# Altium PCB Copy of PCB1.PcbDoc
Units mm, origin at the board's own origin, x right, y up, seen from the top; angles counter-clockwise.
Board outline 80 x 60 mm, 2 copper layers (Top Layer, Bottom Layer); 55 components, 79 nets, 357 pads, 132 vias.
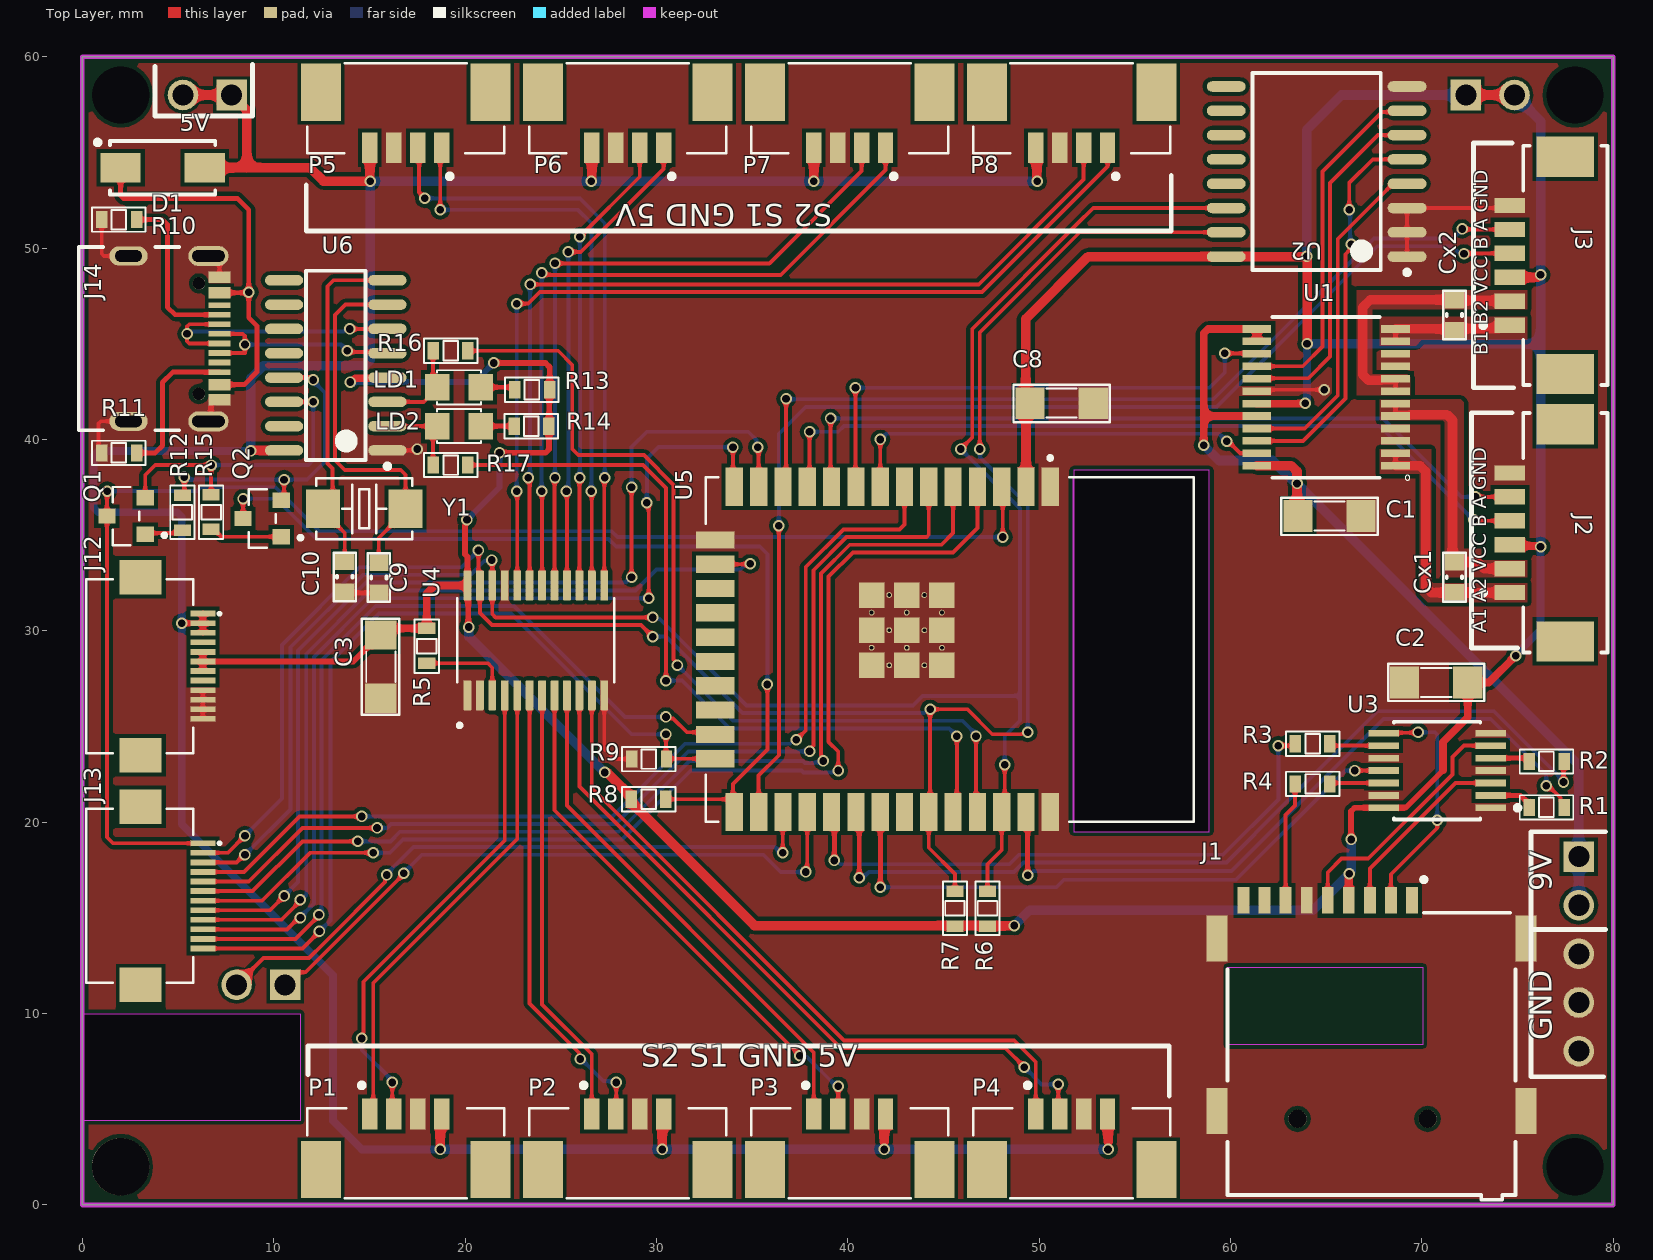
[diagram p0: Top Layer view]
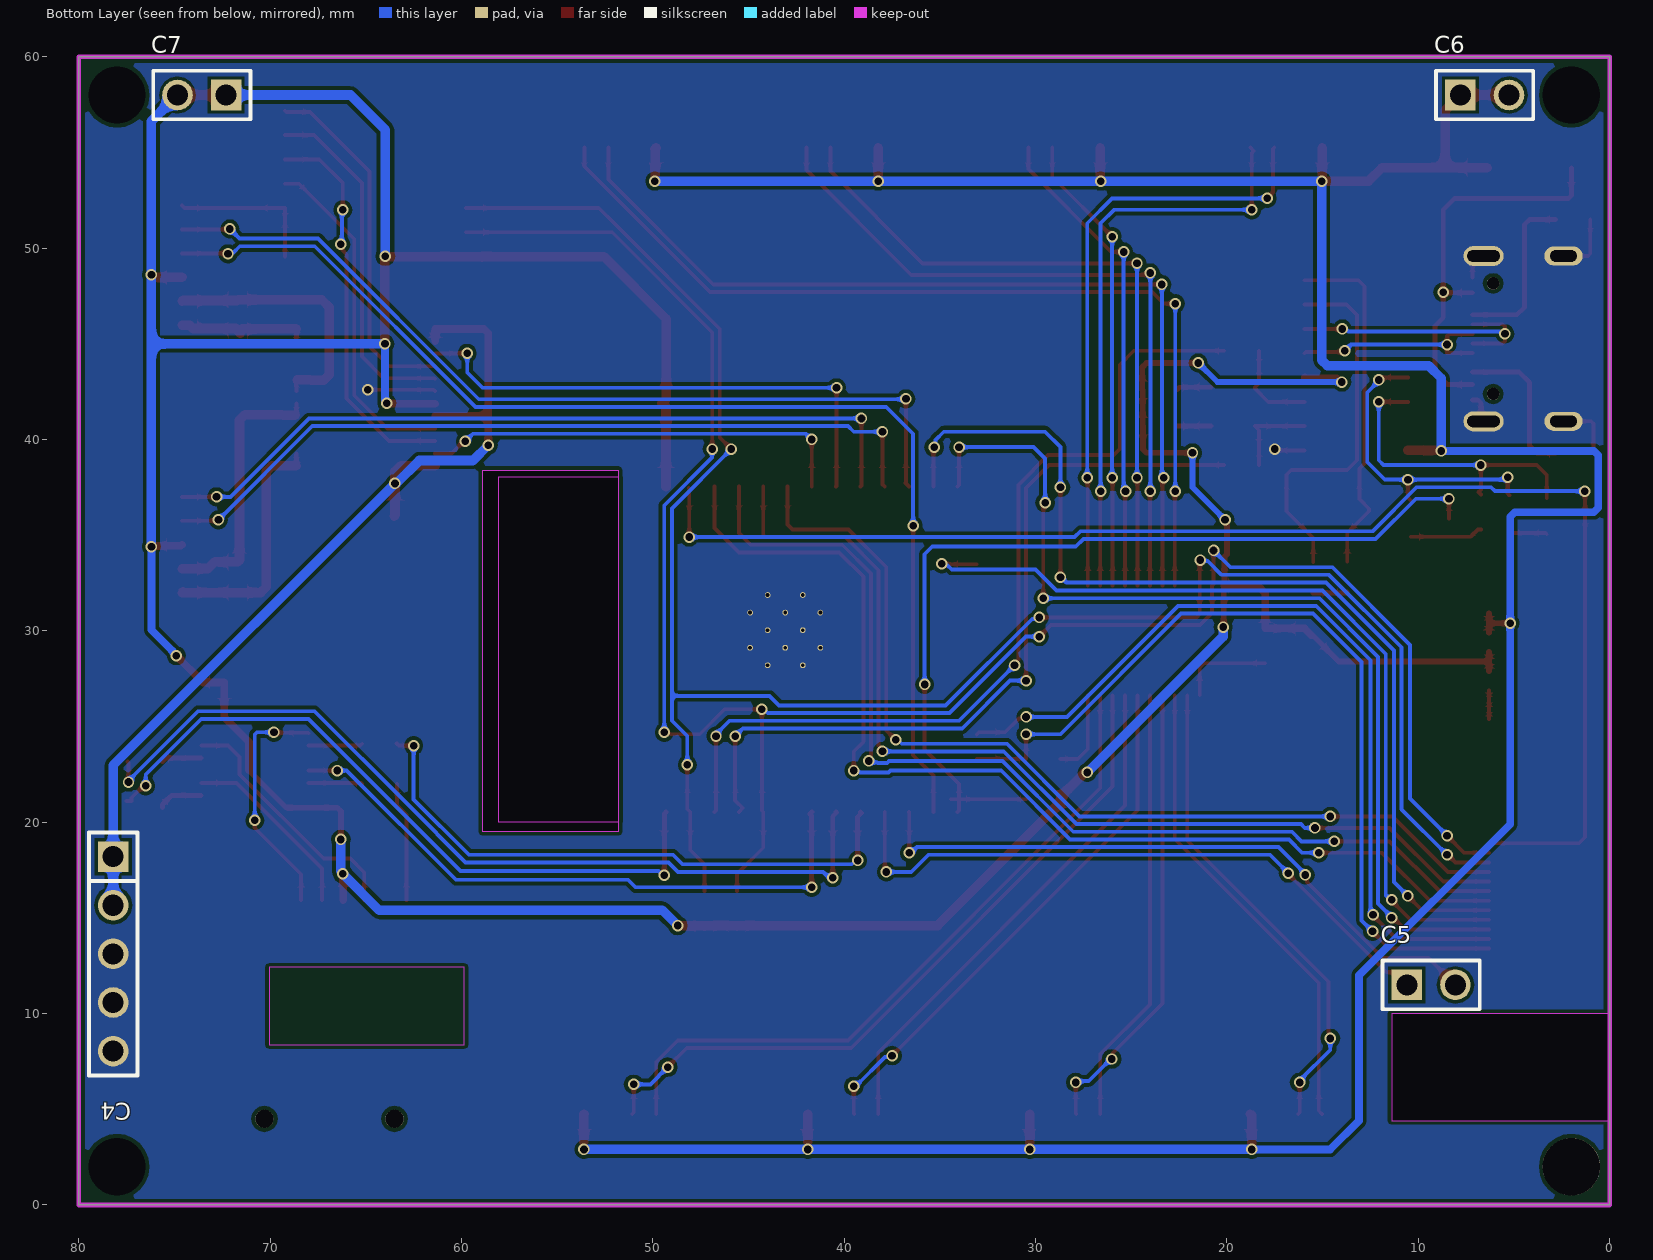
[diagram p1: Bottom Layer view, seen from below]

## Layer stack, top to bottom
Top Solder: solder mask 0.0102, Solder Resist, Dk 3.5
Top Layer: signal copper 0.0356
Dielectric 1: dielectric 0.32, FR-4, Dk 4.8
Bottom Layer: signal copper 0.0356
Bottom Solder: solder mask 0.0102, Solder Resist, Dk 3.5

## Board outline
0,0 0,60 80,60 80,0
cut-out: -0.002,10 11.4,10 11.4,4.4 0,4.4
cut-out: 51.8,19.5 58.9,19.5 58.9,38.4 51.8,38.4

## Design rules (kind name [scope] priority, off if disabled: settings)
Clearance [All] p1: gap=0.2 ignorepadtopadclearanceinfootprint=FALSE
PlaneClearance [All] p1: clearance=0.5
PlaneConnect [All] p1: planeconnectstyle=Direct reliefexpansion=0.5 reliefentries=4 reliefconductorwidth=0.5 reliefairgap=0.5
PolygonConnect [All] p1: connectstyle=Direct reliefconductorwidth=0.254 reliefentries=4 polygonreliefangle="90 Angle" airgapwidth=0.254
RoutingVias [All] p1: holewidth=0.4 width=0.6 viastyle="Through Hole" minholewidth=0.4 minwidth=0.6 maxholewidth=0.4 maxwidth=0.6
SolderMaskExpansion [All] p1: expansion=0.102 istentingtop=FALSE
Width lcd [InNetClass('LCD')] p1: maxlimit=0.2 minlimit=0.2 preferedwidth=0.2
Width MCU [InNetClass('MCU')] p2: maxlimit=0.2 minlimit=0.2 preferedwidth=0.2
Width P_VCC [InNetClass('P_VCC')] p3: maxlimit=0.5 minlimit=0.3 preferedwidth=0.4
Width FLASH [InNetClass('Flash')] p4: maxlimit=0.2 minlimit=0.2 preferedwidth=0.2
Width SENSOR_INPUT [InNetClass('SENSOR_INPUT')] p5: maxlimit=0.2 minlimit=0.2 preferedwidth=0.2
Width Motor [InNetClass('Motor')] p6: maxlimit=0.5 minlimit=0.2 preferedwidth=0.5
28 further rules are at their usual default settings.

## Classes and differential pairs
net class GND: GND
net class LCD: LCD_CE LCD_CLK LCD_DC LCD_DIN LCD_RST
net class MCU: GPIO_0 SCL SDA SPI_CLK SPI_MISO SPI_MOSI SW_CANCEL SW_DE SW_IND SW_OK U2_RX U2_TX
net class Motor: AO1 AO2 BO1 BO2 DIR_A1 DIR_A2 DIR_B1 DIR_B2 HAL_CHA_M1 HAL_CHA_M2 HAL_CHB_M1 HAL_CHB_M2 PWMA PWMB
net class P_VCC: +5 +9 VCC
net class Flash: D+ D- DTR_CH340 EN GPIO_0 MCU_RX MCU_TX NetQ1_1 NetQ2_1 RST_CH340 USB_RX USB_TX XI XO
net class SENSOR_INPUT: GND NetJ1_P9 NetJ1_SH1 NetJ1_SH2 NetJ1_SH3 NetJ1_SH4 NetR5_1 NetU2_9 NetU2_10 NetU2_11 NetU2_12 NetU2_13 NetU2_14 NetU2_15 NetU2_16 NetU3_13 NetU4_5 NetU4_6 NetU4_7 NetU4_17 NetU4_18 NetU4_19 NetU4_20 NetU4_21 NetU4_22 NetU5_9 NetU5_10 NetU5_11 NetU5_12 NetU5_15 NetUSB1_6 NetUSB1_7 NetUSB1_8 NetUSB1_9 SCL_0 SCL_1 SCL_2 SCL_3 SCL_4 SCL_5 SCL_6 SCL_7 SDA_0 SDA_1 SDA_2 SDA_3 SDA_4 SDA_5 SDA_6 SDA_7

## Components (designator, comment, footprint, x,y, rotation, side; value= is the part's Value field where it differs from the comment)
C1 "22uF 10V" CN-SMD-1206 65.2,36 r180 top value=103
C2 "22uF 6.3" CN-SMD-1206 70.724,27.3 r0 top value=103
C3 "22uF 6.3" CN-SMD-1206 15.6,28.1 r90 top value=103
C4 "JP5" JP5-D1T 78.2,18.2 r270 bottom locked
C5 "JP2" JP2-D1T 10.6,11.5 r180 bottom
C6 "JP2" JP2-D1T 7.8,58 r180 bottom locked
C7 "JP2" JP2-D1T 72.3,58 r0 bottom
C8 "22uF 6.3V" CN-SMD-1206 51.2,41.9 r180 top value=103
C9 "22pF" CN-SMD-0603 15.494,32.784 r270 top value=103
C10 "22pF" CN-SMD-0603 13.716,32.822 r270 top value=103
Cx1 "104" CN-SMD-0603 71.7,32.8 r270 top value=33pF
Cx2 "104" CN-SMD-0603 71.7,46.5 r270 top value=33pF
D1 "D Schottky" SS34 4.2,54.2 r0 top
J1 "MEM2075-00-140-01-A" GCT_MEM2075-00-140-01-A 66.9,4.5 r0 top
J2 "532610671" Molex_0_MFG 77.5,35.125 r90 top
J3 "532610671" Molex_0_MFG 77.5,49.1 r90 top
J12 "FH12-12S-0.5SH(55)" HIROSE_FH12-12S-0.5SH(55) 6.3,28.15 r270 top
J13 "FH12-12S-0.5SH(55)" HIROSE_FH12-12S-0.5SH(55) 6.3,16.15 r270 top
J14 "USB4105_REVA" GCT_USB4105_REVA 2.413,45.268 r270 top
LD1 "LED" LED-0805-Red 20.828,42.728 r180 top value="LED 3 - 5 ly 2 Colour" (schematic designator LED1)
LD2 "LED" LED-0805-Red 20.828,40.696 r180 top value="LED 3 - 5 ly 2 Colour" (schematic designator LED2)
P1 "3-1734261-4" TE_3-1734261-4 16.9,2.7 r0 top (schematic designator J4)
P2 "3-1734261-4" TE_3-1734261-4 28.5,2.7 r0 top (schematic designator J5)
P3 "3-1734261-4" TE_3-1734261-4 40.1,2.7 r0 top (schematic designator J6)
P4 "3-1734261-4" TE_3-1734261-4 51.7,2.7 r0 top (schematic designator J7)
P5 "3-1734261-4" TE_3-1734261-4 16.9,57.3 r180 top (schematic designator J8)
P6 "3-1734261-4" TE_3-1734261-4 28.5,57.3 r180 top (schematic designator J9)
P7 "3-1734261-4" TE_3-1734261-4 40.1,57.3 r180 top (schematic designator J10)
P8 "3-1734261-4" TE_3-1734261-4 51.7,57.3 r180 top (schematic designator J11)
Q1 "MMSS8050-H-TP" TRANS_MMSS8050-H-TP 2.286,35.997 r180 top
Q2 "MSS8050-H-TP" TRANS_MMSS8050-H-TP 9.398,35.87 r180 top
R1 "3k3" RES-SMD-0603 76.511,20.775 r0 top
R2 "3k3" RES-SMD-0603 76.511,23.175 r0 top
R3 "3k3" RES-SMD-0603 64.3,24.1 r180 top
R4 "3k3" RES-SMD-0603 64.3,22 r180 top
R5 "4k7" RES-SMD-0603 18,29.2 r90 top
R6 "4k7" RES-SMD-0603 47.3,15.5 r270 top
R7 "4k7" RES-SMD-0603 45.6,15.5 r270 top
R8 "10k" RES-SMD-0603 29.6,21.2 r180 top
R9 "10k" RES-SMD-0603 29.6,23.3 r0 top
R10 "5K1" RES-SMD-0603 1.905,51.491 r0 top
R11 "5K1" RES-SMD-0603 1.905,39.299 r0 top
R12 "10k" RES-SMD-0603 5.229,36.192 r270 top
R13 "1k" RES-SMD-0603 23.495,42.601 r0 top
R14 "1k" RES-SMD-0603 23.457,40.696 r0 top
R15 "10k" RES-SMD-0603 6.731,36.192 r90 top
R16 "470" RES-SMD-0603 19.252,44.633 r180 top
R17 "470" RES-SMD-0603 19.252,38.664 r180 top
U1 "TB6612FNG,C,8,EL" SOP65P760X160-24N 65,42.2 r180 top
U2 "PCF8574" SO16L 64.5,54 r180 top
U3 "SN74HC125PWR" Texas_Instruments_PW0014A_MFG 70.8,22.7 r180 top
U4 "TCA9548APWR" SOP65P640X120-24N 23.7,29.5 r90 top
U5 "ESP32-WROOM-32" MODULE_ESP32-WROOM-32 45.323,29.035 r270 top
U6 "CH340G" SO16 13.241,43.871 r180 top
Y1 "12M-5032" X2-SMD-5.0X3.2X1.3MM 14.732,36.378 r0 top

## Footprints (in the part's own frame and the unit in brackets; to place one, negate y for a bottom-side part, rotate by r counter-clockwise, add the part's x,y. Pads: shape width x height; smd on the part's side, far side on the other; paste and mask are expansions set on the pad)
CN-SMD-0603 [mm]
  rect 0.9x1 smd: 1(-0.8,0) 2(0.8,0)
  silkscreen extent -1.27,-0.58 1.27,0.58, body extent -0.8,-0.4 0.8,0.4, height 0.3
CN-SMD-1206 [mil]
  rect 60x65 smd: 1(-64,0) 2(66,0)
  silkscreen extent -98,-38 100,39, body extent -63,-31 63,32, height 40
GCT_MEM2075-00-140-01-A [mm]
  rect 0.62x1.4 smd: P1(2.58,11.42) P2(1.48,11.42) P3(0.38,11.42) P4(-0.72,11.42) P5(-1.82,11.42) P6(-2.92,11.42) P7(-4.02,11.42) P8(-5.12,11.42) P9(-6.22,11.42)
  rect 1.1x2.4 smd: SH1(-7.6,0.42) SH2(-7.6,9.42) SH3(8.55,9.42) SH4(8.55,0.42)
  round 0.95 hole 0.95 unplated: ""(-3.4,0) ""(3.4,0)
  Keep-Out Layer region: 3.15,3.87 -7.05,3.87 -7.05,7.92 3.15,7.92
  Keep-Out Layer region: 3.15,3.87 -7.05,3.87 -7.05,7.92 3.15,7.92
  silkscreen extent -7.05,-4.23 8,12.62
GCT_USB4105_REVA [mm]
  rect 0.6x1.15 smd: A1/B12(-3.2,4.755) A4/B9(-2.4,4.755) B1/A12(3.2,4.755) B4/A9(2.4,4.755)
  rect 0.3x1.15 smd: A5(-1.25,4.755) A6(-0.25,4.755) A7(0.25,4.755) A8(1.25,4.755) B5(1.75,4.755) B6(0.75,4.755) B7(-0.75,4.755) B8(-1.75,4.755)
  oval 1x2 hole 0.6 slot 1.4 at 90 deg: G1(-4.32,0) G2(4.32,0)
  oval 1.05x2.1 hole 0.6 slot 1.7 at 90 deg: G3(-4.32,4.18) G4(4.32,4.18)
  round 0.65 hole 0.65 unplated: ""(-2.89,3.68) ""(2.89,3.68)
  silkscreen extent -4.79,-2.6 4.79,2.65
HIROSE_FH12-12S-0.5SH(55) [mm]
  rect 0.3x1.3 smd paste-2: 1(-2.75,0) 2(-2.25,0) 3(-1.75,0) 4(-1.25,0) 5(-0.75,0) 6(-0.25,0) 7(0.25,0) 8(0.75,0) 9(1.25,0) 10(1.75,0) 11(2.25,0) 12(2.75,0)
  rect 1.8x2.2 smd: S1(-4.65,-3.25) S2(4.65,-3.25)
  silkscreen extent -4.55,-6.1 4.55,0.94
JP2-D1T [mm] "2 pins, 1 row, straight, gold plating"
  rect 1.6x1.6 hole 1.1: 1(0,0)
  round 1.6 hole 1.1: 2(2.54,0)
  silkscreen extent -1.27,-1.27 3.81,1.27, body extent -1.27,-1.27 3.81,1.27, height 8.54
JP5-D1T [mm] "5 pins, 1 row, straight, gold plating"
  rect 1.6x1.6 hole 1.1: 1(0,0)
  round 1.6 hole 1.1: 2(2.54,0) 3(5.08,0) 4(7.62,0) 5(10.16,0)
  silkscreen extent -1.27,-1.27 11.43,1.27, body extent -1.27,-1.27 11.43,1.27, height 8.54
LED-0805-Red [mil]
  rect 50x55 smd: 1(0,0) 2(90,0)
  silkscreen extent 0,-35 90,35, body extent 5,-25 85,25, height 43
MODULE_ESP32-WROOM-32 [mm]
  rect 2x0.9 smd: 1(-8.5,5.26) 2(-8.5,3.99) 3(-8.5,2.72) 4(-8.5,1.45) 5(-8.5,0.18) 6(-8.5,-1.09) 7(-8.5,-2.36) 8(-8.5,-3.63) 9(-8.5,-4.9) 10(-8.5,-6.17) 11(-8.5,-7.44) 12(-8.5,-8.71) 13(-8.5,-9.98) 14(-8.5,-11.25) 25(8.5,-11.25) 26(8.5,-9.98) 27(8.5,-8.71) 28(8.5,-7.44) 29(8.5,-6.17) 30(8.5,-4.9) 31(8.5,-3.63) 32(8.5,-2.36) 33(8.5,-1.09) 34(8.5,0.18) 35(8.5,1.45) 36(8.5,2.72) 37(8.5,3.99) 38(8.5,5.26)
  rect 0.9x2 smd: 15(-5.715,-12.25) 16(-4.445,-12.25) 17(-3.175,-12.25) 18(-1.905,-12.25) 19(-0.635,-12.25) 20(0.635,-12.25) 21(1.905,-12.25) 22(3.175,-12.25) 23(4.445,-12.25) 24(5.715,-12.25)
  rect 1.33x1.33 smd: 39_1(-2.835,-0.405) 39_2(-1,-0.405) 39_3(0.835,-0.405) 39_4(-2.835,-2.24) 39_5(-1,-2.24) 39_6(0.835,-2.24) 39_7(-2.835,-4.075) 39_8(-1,-4.075) 39_9(0.835,-4.075)
  round 0.3 hole 0.2: 39_10(-1.917,-0.405) 39_11(-0.082,-0.405) 39_12(-2.835,-1.322) 39_13(-1,-1.322) 39_14(0.835,-1.322) 39_15(-1.917,-2.24) 39_16(-0.082,-2.24) 39_17(-2.835,-3.157) 39_18(-1,-3.157) 39_19(0.835,-3.157) 39_20(-1.917,-4.075) 39_21(-0.082,-4.075)
  Keep-Out Layer region: 9,6.45 -9,6.45 -9,12.75 9,12.75
  Keep-Out Layer region: 9,6.45 -9,6.45 -9,12.75 9,12.75
  silkscreen extent -10.1,-12.75 9,12.75
Molex_0_MFG [mm]
  rect 0.8x1.6 smd paste+0 mask+0: 1(-3.125,2.9) 2(-1.875,2.9) 3(-0.625,2.9) 4(0.625,2.9) 5(1.875,2.9) 6(3.125,2.9)
  rect 2.1x3 smd paste+0 mask+0: 7(-5.675,0) 8(5.675,0)
  silkscreen extent -6.25,-2.2 6.25,4.42, body extent -6.83,-2.3 6.83,3.8, height 0.25
RES-SMD-0603 [mm]
  rect 0.6x0.9 smd: 1(-0.889,0) 2(0.927,0)
  silkscreen extent -1.4,-0.64 1.4,0.64, body extent -0.8,-0.4 0.8,0.4, height 0.43
SO16 [mm] "SOIC, 16-Leads, Body 9.90x3.91mm, Pitch 1.27mm, IPC Medium Density"
  oval 2x0.55 smd: 1(-2.7,4.445) 2(-2.7,3.175) 3(-2.7,1.905) 4(-2.7,0.635) 5(-2.7,-0.635) 6(-2.7,-1.905) 7(-2.7,-3.175) 8(-2.7,-4.445) 9(2.7,-4.445) 10(2.7,-3.175) 11(2.7,-1.905) 12(2.7,-0.635) 13(2.7,0.635) 14(2.7,1.905) 15(2.7,3.175) 16(2.7,4.445)
  silkscreen extent -2.83,-4.95 1.55,5.39, body extent -3,-4.95 3,4.95, height 1.4
SO16L [mm] "SOIC, 16-Leads, Body 10.30x7.50mm, Pitch 1.27mm, IPC Medium Density"
  oval 2.032x0.55 smd: 1(-4.725,4.445) 2(-4.725,3.175) 3(-4.725,1.905) 4(-4.725,0.635) 5(-4.725,-0.635) 6(-4.725,-1.905) 7(-4.725,-3.175) 8(-4.725,-4.445) 9(4.725,-4.445) 10(4.725,-3.175) 11(4.725,-1.905) 12(4.725,-0.635) 13(4.725,0.635) 14(4.725,1.905) 15(4.725,3.175) 16(4.725,4.445)
  silkscreen extent -4.85,-5.15 3.35,5.39, body extent -5.15,-5.17 5.16,5.16, height 2.48
SOP65P640X120-24N [mm]
  rrect25% 1.57x0.41 smd: 1(-2.87,3.575) 2(-2.87,2.925) 3(-2.87,2.275) 4(-2.87,1.625) 5(-2.87,0.975) 6(-2.87,0.325) 7(-2.87,-0.325) 8(-2.87,-0.975) 9(-2.87,-1.625) 10(-2.87,-2.275) 11(-2.87,-2.925) 12(-2.87,-3.575) 13(2.87,-3.575) 14(2.87,-2.925) 15(2.87,-2.275) 16(2.87,-1.625) 17(2.87,-0.975) 18(2.87,-0.325) 19(2.87,0.325) 20(2.87,0.975) 21(2.87,1.625) 22(2.87,2.275) 23(2.87,2.925) 24(2.87,3.575)
  silkscreen extent -4.54,-4.1 2.2,4.1
SOP65P760X160-24N [mm]
  rect 1.5x0.4 smd: 1(-3.625,3.575) 2(-3.625,2.925) 3(-3.625,2.275) 4(-3.625,1.625) 5(-3.625,0.975) 6(-3.625,0.325) 7(-3.625,-0.325) 8(-3.625,-0.975) 9(-3.625,-1.625) 10(-3.625,-2.275) 11(-3.625,-2.925) 12(-3.625,-3.575) 13(3.625,-3.575) 14(3.625,-2.925) 15(3.625,-2.275) 16(3.625,-1.625) 17(3.625,-0.975) 18(3.625,-0.325) 19(3.625,0.325) 20(3.625,0.975) 21(3.625,1.625) 22(3.625,2.275) 23(3.625,2.925) 24(3.625,3.575)
  silkscreen extent -4.38,-4.2 2.8,4.33
SS34 [mm]
  rect 2.1x1.55 smd: 1(-2.2,0) 2(2.2,0)
  silkscreen extent -3.52,-1.4 2.75,1.45, body extent -2.75,-1.4 2.75,1.4, height 2.3
TE_3-1734261-4 [mm]
  rect 0.8x1.6 smd: 1(-1.875,2.05) 2(-0.625,2.05) 3(0.625,2.05) 4(1.875,2.05)
  rect 2.1x3 smd: P1(-4.425,-0.85) P2(4.425,-0.85)
  silkscreen extent -5.15,-2.35 5.15,3.65
Texas_Instruments_PW0014A_MFG [mm]
  rect 1.6x0.35 smd paste-1000 mask+0: 1(-2.8,1.95) 2(-2.8,1.3) 3(-2.8,0.65) 4(-2.8,0) 5(-2.8,-0.65) 6(-2.8,-1.3) 7(-2.8,-1.95) 8(2.8,-1.95) 9(2.8,-1.3) 10(2.8,-0.65) 11(2.8,0) 12(2.8,0.65) 13(2.8,1.3) 14(2.8,1.95)
  silkscreen extent -4.33,-2.55 2.25,2.55, body extent -3.7,-2.8 3.7,2.8, height 0.25
TRANS_MMSS8050-H-TP [mm]
  rect 0.9x0.8 smd: 1(-1,0.95) 2(-1,-0.95) 3(1,0)
  silkscreen extent -2.1,-1.52 0.7,1.52
X2-SMD-5.0X3.2X1.3MM [mil]
  rect 70x80 smd: 1(-85,0) 2(85,0)
  silkscreen extent -98,-63 98,63

## Part data
C1 C2 C3 C8: library part C, "Cap SMD 1206 >5V"
C4: "WR-PHD 2.54 mm Angled Socket Header", Manufacturer="W¨¹rth Elektronik eiSos GmbH", partNo=613005143121, ComponentLink1 Description=Manufacturer, ComponentLink1URL=http://www.we-online.com, ComponentLink2 Description=Datasheet, ComponentLink2URL=http://katalog.we-online.de/em/datasheet/6130xx143121.pdf, Created by="Karrer Zheng", Created Date="29 March 2013", NoPins=05
C5 C6 C7: "WR-PHD 2.54 mm Angled Socket Header", Manufacturer="W¨¹rth Elektronik eiSos GmbH", partNo=613002143121, ComponentLink1 Description=Manufacturer, ComponentLink1URL=http://www.we-online.com, ComponentLink2 Description=Datasheet, ComponentLink2URL=http://katalog.we-online.de/em/datasheet/6130xx143121.pdf, Created by="Karrer Zheng", Created Date="29 March 2013", NoPins=02
C9 C10: library part C, "Cap SMD"
Cx1 Cx2: library part CN
D1: "Schottky Diode", Code_JEDEC=DO-214-AA, LatestRevisionDate=17-Jul-2002, LatestRevisionNote="Re-released for DXP Platform.", PackageDescription="DO-214-AA/SMB; 2 C-Bend Leads; Body 5.3 x 3.6 mm, inc. leads (LxW)", PackageReference=SMB, Published=8-Jun-2000, Publisher="Altium Limited"
J1: "9 _8 + 1_ Position Card Connector microSDâ„¢ Surface Mount, Right Angle Gold", Package="Package Analog Devices", Availability=Unavailable, MF="Global Connector Technology", MP=MEM2075-00-140-01-A, Price=None, SnapEDA_Link=https://www.snapeda.com/parts/MEM2075-00-140-01-A/Global%20Connector%20Technology/view-part/2680480/?ref=snap
J12 J13: "12 Position FFC, FPC Connector Contacts, Bottom 0.020 _0.50mm_ Surface Mount, Right Angle", Package=None, Availability=Unavailable, MF=Hirose, MP=FH12-12S-0.5SH_55_, Price=None, SnapEDA_Link=https://www.snapeda.com/parts/FH12-12S-0.5SH%2855%29/Hirose%20Electric%20Co%20Ltd/view-part/110249/?ref=snap
J14: "USB-C _USB TYPE-C_ USB 2.0 Receptacle Connector 24 _16+8 Dummy_ Position Surface Mount, Right Angle; Through Hole", Package="Package Analog Devices", Availability=Unavailable, MF="Global Connector Technology", MP=USB4105, Price=None, SnapEDA_Link=https://www.snapeda.com/parts/USB4105/Global%20Connector%20Technology/view-part/4223080/?ref=snap
LD1 LD2: library part "LED SMD"
P1 P2 P3 P4 P5 P6 P7 P8: "4ä½å•æŽ’1.25mmç›´è§’è¡¨é¢å®‰è£…æŽ¥å¤´è¿žæŽ¥å™¨", Package=None, Availability=Unavailable, EU_RoHS_Compliance=Compliant, MF="TE Connectivity", MP=3-1734261-4, Price=None, SnapEDA_Link=https://www.snapeda.com/parts/3-1734261-4/TE%20Connectivity%20AMP%20Connectors/view-part/1366391/?ref=snap
Q1: "Bipolar _BJT_ Transistor NPN 25V 1.5A 100MHz 625mW Surface Mount SOT-23", Package="SOT-23 Micro Commercial", Availability=Unavailable, MF="Micro Commercial", MP=MMSS8050-H-TP, Price=None, SnapEDA_Link=https://www.snapeda.com/parts/MMSS8050-H-TP/Micro%20Commercial/view-part/423878/?ref=snap
Q2: library part MMSS8050-H-TP, "Bipolar _BJT_ Transistor NPN 25V 1.5A 100MHz 625mW Surface Mount SOT-23", Package="SOT-23 Micro Commercial", Availability=Unavailable, MF="Micro Commercial", MP=MMSS8050-H-TP, Price=None, SnapEDA_Link=https://www.snapeda.com/parts/MMSS8050-H-TP/Micro%20Commercial/view-part/423878/?ref=snap
R1 R2 R3 R4 R5 R6 R7 R8 R9 R10 R11 R12 R13 R14 R15 R16 R17: library part Res-SMD, "Resistor", Manufacturer="Generic Components", Class=Passive, Published=08/06/2000, Publisher="Altium Hobart Technology Centre"
U1: "Motor Driver Power MOSFET Parallel 24-SSOP", Package="SSOP-24 Toshiba", Digi-Key_Part_Number=TB6612FNGC8ELCT-ND, Digi-Key_Purchase_URL=https://www.digikey.com/product-detail/en/toshiba-semiconductor-and-storage/TB6612FNG,C,8,EL/TB6612FNGC8ELCT-ND/1730134?utm_source=snapeda&utm_medium=aggregator&utm_campaign=symbol, MF=Toshiba, MP=TB6612FNG,C,8,EL, SnapEDA_Link=https://www.snapeda.com/parts/TB6612FNG%2CC%2C8%2CEL/Toshiba%20Semiconductor%20and%20Storage/view-part/424445/?ref=snap
U2: "I2C PORT EXPANDER", Frequency - Clock=100KHz, Manufacturer="NXP Semiconductors", Manufacturer Part Number=PCF8574T/3,512, Operating Temperature="-40°C ~ 85°C", Package / Case="16-SOIC (7.5mm Width)", Supplier Part Number=568-1076-5-ND, Voltage - Supply="2.5 V ~ 6 V", Category="Integrated Circuits (ICs)", Includes=POR, Interface=I²C, Interrupt Output=Yes, Number of I /O=8, Packaging=Tube, RoHS="RoHS Compliant", Supplier=Digi-Key, Supplier 1=Digi-Key, Supplier Part Number 1=568-1076-5-ND
U4: "Low-Voltage 8-Channel I2C Switch With Reset", Package="TSSOP-24 Texas Instruments", Arrow_Electronics-Purchase-URL=https://snapeda.com/shop?store=Arrow+Electronics&id=280817, Availability=Unavailable, DigiKey-Purchase-URL=https://snapeda.com/shop?store=DigiKey&id=280817, MF="Texas Instruments", Mouser-Purchase-URL=https://snapeda.com/shop?store=Mouser&id=280817, MP=TCA9548APWR, Price=None, SnapEDA_Link=https://www.snapeda.com/parts/TCA9548APWR/Texas%20Instruments/view-part/280817/?ref=snap, Texas_Instruments-Purchase-URL=https://snapeda.com/shop?store=Texas+Instruments&id=280817
U5: "Bluetooth, WiFi Transceiver Module 2.4GHz ~ 2.5GHz Surface Mount", Package="Module Espressif Systems", Digi-Key_Part_Number=1904-1010-1-ND, Digi-Key_Purchase_URL=https://www.digikey.com/product-detail/en/espressif-systems/ESP32-WROOM-32/1904-1010-1-ND/8544305?utm_source=snapeda&utm_medium=aggregator&utm_campaign=symbol, MF="Espressif Systems", MP=ESP32-WROOM-32, SnapEDA_Link=https://www.snapeda.com/parts/ESP32-WROOM-32/Espressif%20Systems/view-part/2753322/?ref=snap
U6: "High and Low Side Driver", ComponentLink1Description="Manufacturer Link", ComponentLink1URL=http://www.irf.com/, ComponentLink2Description=Datasheet, ComponentLink2URL=http://www.irf.com/product-info/datasheets/data/ir2110.pdf, DatasheetVersion=PD60147J, LatestRevisionDate=04-Mar-2005, LatestRevisionNote="Stylized 3D Model Added.", Note="Pins 4, 8 and 14 are not connected", PackageDescription="DIP; 14 Leads; Row Spacing 7.62 mm; Pitch 2.54 mm", PackageReference=PDIP14, Published=8-Jun-2000, Publisher="Altium Limited"
Y1: library part SMD-CRYSTAL-8MHZ-20PF-20PPM(2P-5.0X3.2MM), "SMD Crystal 8MHz-20pF-20ppm;", Package=None, Availability=Unavailable, MF=Xinhunjing, MP=5032/4P, Price=None, SnapEDA_Link=https://www.snapeda.com/parts/5032/4P/Xinhunjing/view-part/105660/?ref=snap

## Free pads (board coordinates)
  round 3 hole 3: 70(2,2)
  round 1.524 hole 3: 70(2,58) 70(78,2) 70(78,58)

## Via types
v1: diameter 0.6, hole 0.4, Top Layer to Bottom Layer, tented both sides, 132 vias

## Nets (pads, with @x,y where several pads share a name; then routed paths per layer and width w, separated by ;. In a path a pad name is that pad's centre, name@x,y a point inside that pad or via, vN(x,y) a via of type N, cw(c..) or ccw(c..) an arc to the next point about the centre after c; other vN are vias at no path point)
+5: C6.1 C6.2 D1.2 J12.1 J12.2 J12.3 P1.4 P2.4 P3.4 P4.4 P5.4 P6.4 P7.4 P8.4 U6.16 | length 179.2
  Top Layer w0.3: v1(5.2,30.4) J12.2 ; J12.3 J12.2 ; J12.1 J12.2
  Top Layer w0.5: C6.2 C6.1 8.6,57.2 8.6,54.2 ; D1.2 8.6,54.2 ; v1(8.8,39.4) 8.826,39.426 U6.16 ; P5.4 15.025,53.521 15.004,53.5 12.6,53.5 11.9,54.2 8.6,54.2 ; v1(18.7,2.9) 18.7,4.675 P1.4 ; v1(26.6,53.5) 26.625,53.525 P6.4 ; v1@30.3,3 P2.4@30.3,4.75 ; v1@38.225,53.625 P7.4 ; 41.9,3.3 P3.4@41.9,4.75 ; P8.4 49.9,55.175 49.881,55.156 49.881,53.619 v1@49.9,53.6 ; P4.4 53.6,4.725 53.6,3.3
  Bottom Layer w0.4: v1(8.8,39.4) 0.834,39.4 0.6,39.166 0.6,36.434 0.834,36.2 4.966,36.2 5.2,35.966 v1(5.2,30.4) 5.2,19.9 13.1,12 13.1,4.4 14.6,2.9 v1(18.7,2.9)
  Bottom Layer w0.5: v1(8.8,39.4) 8.8,43.2 9.459,43.859 14.757,43.859 15.05,44.152 v1(15.05,53.5) v1(26.6,53.5) v1(38.225,53.5) v1(49.9,53.5) ; v1(18.7,2.9) v1(30.3,2.9) v1(41.9,2.9) v1(53.6,2.9)
+9: C1.2 C4.1 C4.2 U1.13 U1.14 U1.20 U1.24 | length 50.6
  Top Layer w0.4: v1(58.6,39.7) 58.6,41.225 ; U1.20 58.6,41.225 ; U1.14 U1.13 58.834,45.775 58.6,45.541 58.6,41.225
  Top Layer w0.5: U1.24 63.182,38.625 63.475,38.332 v1(63.475,37.7) 63.475,36.049 C1.2
  Bottom Layer w0.5: v1(58.6,39.7) 59.4,38.9 62.2,38.9 63.381,37.719 63.456,37.719 63.494,37.681 78.2,22.975 C4.1 C4.2
AO1: Cx1.2 J2.1 U1.1 U1.2 | length 12.9
  Top Layer w0.2: U1.1 U1.2
  Top Layer w0.5: U1.1 69.907,38.625 70.2,38.332 70.2,32.293 70.493,32 74.5,32 74.55,32.05 J2.1
AO2: Cx1.1 J2.2 U1.5 U1.6 | length 14.2
  Top Layer w0.2: U1.5 U1.6
  Top Layer w0.5: U1.5@68.675,41.275 69.342,41.275 69.367,41.3 71.307,41.3 71.6,41.007 71.6,33.7 Cx1.1 72.9,33.6 73.25,33.25 J2.2
BO1: Cx2.2 J3.1 U1.11 U1.12 | length 7
  Top Layer w0.2: U1.11 U1.12
  Top Layer w0.5: U1.12 71.45,45.775 71.55,45.675 71.55,45.55 Cx2.2 71.8,45.8 74.025,45.8 74.2,45.975 J3.1
BO2: Cx2.1 J3.2 U1.7 U1.8 | length 13.9
  Top Layer w0.2: U1.7 U1.8
  Top Layer w0.5: U1.8@68.575,43.125 67.908,43.125 67.883,43.1 67.193,43.1 66.9,43.393 66.9,46.9 67.3,47.3 Cx2.1 71.737,47.262 74.563,47.262 J3.2
CC1: J14.A5 R10.2 | length 8.9
  Top Layer w0.254: R10.2 4.191,51.491 4.445,51.237 4.445,46.919 4.846,46.518 J14.A5
CC2: J14.B5 R11.2 | length 8
  Top Layer w0.254: R11.2 3.81,39.299 4.191,39.68 4.191,42.982 4.727,43.518 J14.B5
D+: J14.A6 J14.B6 U6.5 | length 11.2
  Top Layer w0.2: J14.B6 8.497,44.518 v1(8.497,44.959) 8.497,45.401 8.38,45.518 J14.A6 ; v1(13.843,44.633) 13.906,44.569 15.877,44.569 U6.5
  Bottom Layer w0.2: v1(8.497,44.959) 13.517,44.959 v1(13.843,44.633)
D-: J14.A7 J14.B7 U6.6 | length 14.8
  Top Layer w0.2: J14.A7 5.59,45.018 5.473,45.135 v1(5.473,45.518) 5.473,45.901 5.59,46.018 J14.B7 ; v1(13.97,45.776) U6.6
  Bottom Layer w0.2: v1(5.473,45.518) 5.55,45.595 5.736,45.595 5.79,45.649 13.653,45.649 13.703,45.699 13.893,45.699 v1(13.97,45.776)
DIR_A1: U1.21 U2.4 | length 17.9
  Top Layer w0.2: U1.21 63.875,40.575 65.6,42.3 65.6,50.481 68.484,53.365 U2.4
DIR_A2: U1.22 U2.5 | length 20.5
  Top Layer w0.2: U1.22 63.791,39.925 66,42.134 66,49.683 66.223,49.906 66.223,50.123 v1(66.3,50.2) ; v1(66.2,52) 66.2,53.4 67.435,54.635 U2.5
  Bottom Layer w0.2: v1(66.2,52) 66.25,51.95 66.25,50.25 v1(66.3,50.2)
DIR_B1: U1.17 U2.6 | length 18.4
  Top Layer w0.2: U1.17 61.4,43.2 64.066,43.2 65.2,44.334 65.2,53.4 67.705,55.905 U2.6
DIR_B2: U1.16 U2.7 | length 18.7
  Top Layer w0.2: U1.16 63.774,43.825 64.8,44.851 64.8,54 67.908,57.108 69.158,57.108 U2.7
DTR_CH340: Q2.2 R12.1 U6.13 | length 16.1
  Top Layer w0.2: R12.1 5.334,37.186 v1(5.334,38.029) ; Q2.2 10.541,36.963 v1(10.541,37.902) ; U6.13 12.065,43.236 v1@12.192,43.109
  Bottom Layer w0.2: v1(5.334,38.029) 5.442,38.029 5.569,37.902 11.752,37.902 12.665,38.815 12.665,42.461 12.065,43.061 v1(12.065,43.109)
EN: J13.1 Q1.3 U5.3 | length 73.8
  Top Layer w0.2: v1(1.3,37.3) 1.286,37.286 Q1.3 1.286,19.214 1.6,18.9 J13.1 ; v1(48.1,34.9) 48.1,37.435 U5.3@48.121,37.456
  Bottom Layer w0.2: v1(1.3,37.3) 6,37.3 6.202,37.502 10.092,37.502 12.395,35.2 27.666,35.2 27.966,34.9 v1(48.1,34.9)
GND: C1.1 C2.1 C3.1 C4.3 C4.4 C4.5 C8.1 C9.2 C10.2 J1.P6 J1.SH1 J1.SH2 J1.SH3 J1.SH4 J2.6 J3.6 J12.9 J12.10 J12.11 J12.12 J14.A1/B12 J14.B1/A12 J14.G1 J14.G2 J14.G3 J14.G4 P1.3 P2.3 P3.3 P4.3 P5.3 P6.3 P7.3 P8.3 R9.1 R10.1 R11.1 U1.3 U1.4 U1.9 U1.10 U1.18 U2.1 U2.2 U2.3 U2.8 U3.1 U3.4 U3.7 U3.10 U3.13 U4.1 U4.2 U4.12 U4.21 U5.1 U5.15 U5.38 U5.39_1 U5.39_2 U5.39_3 U5.39_4 U5.39_5 U5.39_6 U5.39_7 U5.39_8 U5.39_9 U5.39_10 U5.39_11 U5.39_12 U5.39_13 U5.39_14 U5.39_15 U5.39_16 U5.39_17 U5.39_18 U5.39_19 U5.39_20 U5.39_21 U6.1 | length 30.3
  Top Layer w0.2: R11.1 0.848,39.467 0.848,40.831 0.965,40.948 J14.G2 ; R10.1 1.016,49.705 1.133,49.588 J14.G1 ; J12.12 J12.11 J12.10 J12.9 ; J14.G3 6.775,49.588 7.168,49.195 J14.A1/B12 ; U6.1 17.426,39.426 v1(17.5,39.5) ; U4.12 27.275,23.825 27.8,23.3 R9.1 ; U1.18 61.45,42.6 v1(64.9,42.6) ; U2.1 U2.2 U2.3 74.47,52.095 J3.6
  Top Layer w0.254: J14.G4 6.72,41.075 6.72,41.895 6.893,42.068 J14.B1/A12 ; C10.2 13.754,31.984 C9.2
GPIO_0: Q2.3 R8.1 U5.25 | length 47.8
  Top Layer w0.2: Q2.3 8.398,36.898 v1(8.4,36.9) ; R8.1 U5.25@34,21.2 ; U5.25 34,20.607 U5.25@34,21.2 ; U5.25@34.423,21.2 U5.25@34,21.2 ; v1(35.8,27.2) 35.8,23.8 34,22 U5.25@34,21.2
  Bottom Layer w0.2: v1(8.4,36.9) 10.129,36.9 12.229,34.8 27.5,34.8 27.9,34.4 35.4,34.4 35.8,34 v1(35.8,27.2)
HAL_CHA_M1: J2.5 U5.10 | length 40.8
  Top Layer w0.2: v1(39.1,41.1) 39.1,37.587 U5.10 ; v1(72.8,37) J2.5
  Bottom Layer w0.2: v1(39.1,41.1) 67.966,41.1 72.066,37 v1(72.8,37)
HAL_CHA_M2: J3.5 U5.12 | length 46.2
  Top Layer w0.2: U5.12 36.8,37.723 36.775,37.747 v1(36.775,42.125) ; v1(72.1,51) 72.125,50.975 J3.5
  Bottom Layer w0.2: v1(36.775,42.125) 36.8,42.1 59.1,42.1 67.5,50.5 71.6,50.5 v1(72.1,51)
HAL_CHB_M1: J2.4 U5.11 | length 41.7
  Top Layer w0.2: U5.11 38,37.653 v1(38,40.4) ; v1(72.7,35.8) 72.75,35.75 J2.4
  Bottom Layer w0.2: v1(38,40.4) 39.5,40.4 39.8,40.7 67.8,40.7 v1(72.7,35.8)
HAL_CHB_M2: J3.4 U5.26 | length 62.6
  Top Layer w0.2: U5.26 35.342,22.443 36.4,23.5 v1(36.4,35.5) ; v1(72.2,49.7) 72.225,49.725 J3.4
  Bottom Layer w0.2: v1(36.4,35.5) 36.4,40.3 37.8,41.7 59.266,41.7 67.666,50.1 71.583,50.1 71.906,49.777 72.123,49.777 v1(72.2,49.7)
LCD_CE: J13.11 U5.23 | length 44.5
  Top Layer w0.2: J13.11 11.149,13.9 12.366,15.118 v1(12.366,15.168) ; v1(30.5,25.5) 30.574,25.426 30.874,25.426 31.6,24.7 32.962,24.7 U5.23
  Bottom Layer w0.2: v1(12.366,15.168) 12.366,15.276 12.5,15.41 12.5,28.466 15.334,31.3 22.566,31.3 28.366,25.5 v1(30.5,25.5)
lCD_CLK: J13.8 U5.13 | length 52.9
  Top Layer w0.2: J13.8 9.8,15.4 10.4,16 v1(10.545,16.145) ; v1(28.7,32.8) v1(28.7,37.5) ; U5.13 v1@35.342,39.458
  Top Layer w0.254: v1@35.3,39.5 v1@35.342,39.458
  Bottom Layer w0.2: v1(10.545,16.145) 11.273,16.873 11.273,28.974 14.826,32.527 28.378,32.527 28.651,32.8 v1(28.7,32.8) ; v1(28.7,37.5) 28.7,39.6 29.5,40.4 34.8,40.4 35.234,39.966 35.234,39.666 v1(35.3,39.6)
LCD_DC: J13.10 U5.14 | length 52.2
  Top Layer w0.2: J13.10 10.7,14.4 11.3,15 v1(11.4,15) ; v1(29.5,36.7) 29.6,36.6 v1(29.6,31.7) ; v1(34,39.6) 34,37.607 U5.14
  Bottom Layer w0.2: v1(11.4,15) 11.4,15.051 12.1,15.751 12.1,28.631 15.169,31.7 v1(29.6,31.7) ; v1(29.5,36.7) 29.5,39 30.1,39.6 v1(34,39.6)
LCD_DIN: J13.9 U5.16 | length 45.6
  Top Layer w0.2: J13.9 10.4,14.9 11.391,15.891 v1(11.391,15.953) ; U5.16 34.88,33.48 v1(34.9,33.5)
  Bottom Layer w0.2: v1(11.391,15.953) 11.453,15.953 11.7,16.2 11.7,28.797 15.003,32.1 28.9,32.1 30,33.2 34.383,33.2 34.606,33.423 34.823,33.423 v1(34.9,33.5)
LCD_RST: J13.12 R9.2 U5.24 | length 45.8
  Top Layer w0.2: J13.12 11.5,13.4 12.393,14.293 v1(12.393,14.296) ; v1(30.5,24.6) 30.5,23.327 R9.2 30.547,23.32 U5.24
  Bottom Layer w0.2: v1(12.393,14.296) 12.396,14.296 12.966,14.866 12.966,28.366 15.5,30.9 22.4,30.9 28.7,24.6 v1(30.5,24.6)
MCU_RX: R17.1 U5.34 | length 41.5
  Top Layer w0.2: R17.1 29.3,38.664 30.5,37.464 v1(30.5,27.4) ; U5.34 45.3,20.737 45.7,21.137 v1(45.7,24.5)
  Bottom Layer w0.2: v1(30.5,27.4) 31.334,27.4 33.834,24.9 45.3,24.9 v1(45.7,24.5)
MCU_TX: R16.1 U5.35 | length 46.6
  Top Layer w0.2: R16.1 24.867,44.633 25.6,43.9 25.6,39.5 25.918,39.182 29.347,39.182 30.9,37.63 30.9,28.508 31.1,28.308 v1(31.1,28.2) ; v1@46.7,24.3 46.7,20.607 U5.35
  Bottom Layer w0.2: v1(31.1,28.2) 34,25.3 46,25.3 v1@46.7,24.6
  other v1: 46.7,24.5
NetD1_1: D1.1 J14.A4/B9 J14.B4/A9 | length 20.9
  Top Layer w0.254: D1.1 2,52.749 2.149,52.6 8.1,52.6 8.7,52 v1(8.7,47.7) v1@8.668,47.668 ; J14.B4/A9 8.468,42.868 9.124,43.524 9.124,45.941 8.7,46.365 8.7,47.636 v1@8.668,47.668 ; J14.A4/B9 v1@8.668,47.668
NetLED1_1: LD1.1 R13.1 | length 1.8
  Top Layer w0.254: LD1.1 22.479,42.728 R13.1
NetLED2_1: LD2.1 R14.1 | length 1.7
  Top Layer w0.254: LD2.1 R14.1
NetQ1_1: Q1.1 R12.2 | length 2
  Top Layer w0.2: Q1.1 3.347,35.108 5.072,35.108 R12.2
NetQ2_1: Q2.1 R15.1 | length 3.8
  Top Layer w0.2: R15.1 6.881,35.303 7.264,34.92 Q2.1
NetR1_1: R1.1 U3.2 | length 2.4
  Top Layer w0.254: U3.2 75.147,21.4 75.622,20.925 R1.1
NetR2_1: R2.1 U3.5 | length 2.1
  Top Layer w0.254: U3.5 75.449,23.35 75.622,23.177 R2.1
NetR3_1: R3.1 U3.9 | length 2.9
  Top Layer w0.2: R3.1 65.289,24 U3.9
NetR4_1: R4.1 U3.12 | length 2.8
  Top Layer w0.2: R4.1 65.239,22.05 U3.12
NetR5_1: R5.1 U4.3 | length 5
  Top Layer w0.2: R5.1 21.189,28.311 21.425,28.075 U4.3
PWMA: U1.23 U5.8 | length 22.7
  Top Layer w0.2: U5.8 41.7,37.543 v1(41.7,40) ; v1(59.8,39.9) 59.9,39.9 60.525,39.275 U1.23
  Bottom Layer w0.2: v1(41.7,40) 41.717,40 42.017,40.3 59.4,40.3 v1(59.8,39.9)
PWMB: U1.15 U5.9 | length 27.5
  Top Layer w0.2: v1(40.4,42.7) 40.4,37.557 U5.9 ; v1(59.7,44.5) 61.35,44.5 U1.15
  Bottom Layer w0.2: v1(40.4,42.7) 58.9,42.7 59.7,43.5 v1(59.7,44.5)
RST_CH340: Q1.2 R15.2 U6.14 | length 16.5
  Top Layer w0.2: Q1.2 3.286,38.14 3.81,38.664 v1(6.731,38.664) 6.731,37.373 6.858,37.246 R15.2 ; U6.14 v1(12.065,41.966)
  Bottom Layer w0.2: v1(6.731,38.664) 11.811,38.664 12.065,38.918 v1(12.065,41.966)
SCL: J13.3 R6.1 U2.14 U4.22 U5.36 | length 106.7
  Top Layer w0.2: J13.3 8.051,17.9 8.451,18.3 v1(8.5,18.3) ; v1(21.4,33.7) 21.425,33.675 U4.22 21.425,30.875 21.6,30.7 v1(29.8,30.7) ; v1(45.9,39.5) 46.5,40.1 46.5,45.766 51.959,51.225 52.829,52.095 U2.14 ; R6.1 47.3,17.8 48.042,18.543 U5.36 48.2,20.692 v1(48.2,23)
  Bottom Layer w0.2: v1(8.5,18.3) 10.873,20.673 10.873,29.14 14.66,32.927 20.276,32.927 21,33.651 21.351,33.651 v1(21.4,33.7) ; v1(29.8,30.7) 29.874,30.626 30.174,30.626 34.7,26.1 43.4,26.1 43.9,26.6 49,26.6 ; v1(45.9,39.5) 49,36.4 49,26.6 ; v1(48.2,23) 48.2,24.5 49,25.3 49,26.6
SCL_0: P1.1 U4.5 | length 25.1
  Top Layer w0.2: P1.1 15.2,4.925 15.2,11.6 22.725,19.125 U4.5
SCL_1: P2.1 U4.7 | length 23
  Top Layer w0.2: U4.7 24.025,10.475 26.625,7.875 P2.1
SCL_2: P3.1 U4.9 | length 27.2
  Top Layer w0.2: U4.9 25.325,20.875 38.225,7.975 P3.1
SCL_3: P4.1 U4.11 | length 36.7
  Top Layer w0.2: U4.11 26.625,21.775 39.8,8.6 48.7,8.6 49.825,7.475 P4.1
SCL_4: P5.1 U4.14 | length 30.5
  Top Layer w0.2: v1(18.7,52) 18.7,54.975 18.6,55.075 P5.1 ; v1(26.6,37.3) 26.625,37.275 U4.14
  Bottom Layer w0.2: v1(18.7,52) 25.9,52 26.6,51.3 v1(26.6,37.3)
SCL_5: P6.1 U4.16 | length 25.3
  Top Layer w0.2: v1@25.3,37.2 25.325,37.175 U4.16 ; v1(25.4,49.8) 26.049,49.8 30.375,54.126 P6.1
  Bottom Layer w0.2: v1(25.3,37.3) 25.4,37.4 v1(25.4,49.8)
SCL_6: P7.1 U4.18 | length 37.7
  Top Layer w0.2: v1(24,48.7) 24.108,48.7 24.208,48.6 36.5,48.6 41.975,54.075 P7.1 ; U4.18 v1@24.025,37.175
  Bottom Layer w0.2: v1(24,37.3) v1(24,48.7)
SCL_7: P8.1 U4.20 | length 49.5
  Top Layer w0.2: v1@22.7,37.2 22.725,37.175 U4.20 ; v1(22.7,47.1) 23.3,47.1 23.9,47.7 47.012,47.7 53.575,54.263 P8.1
  Bottom Layer w0.2: v1(22.7,37.3) v1(22.7,47.1)
SD_CLK: J1.P5 U3.6 | length 13.2
  Top Layer w0.2: J1.P5 65.08,17.38 65.8,18.1 67.2,18.1 71.6,22.5 71.6,23.4 72.2,24 U3.6
SD_CMD: J1.P3 U3.3 | length 9.8
  Top Layer w0.2: J1.P3 67.28,17.58 71.75,22.05 U3.3
SD_DATA0: J1.P7 R4.2 | length 6.3
  Top Layer w0.2: J1.P7 62.88,20.38 63.373,20.873 R4.2
SD_DATA3: J1.P2 U3.8 | length 12.5
  Top Layer w0.2: U3.8 68.025,24.675 69.775,24.675 v1(69.8,24.7) ; J1.P2 68.38,17.28 70.8,19.7 v1(70.8,20.1)
  Bottom Layer w0.2: v1(69.8,24.7) 70.683,24.7 70.8,24.583 v1(70.8,20.1)
SDA: J13.2 R7.1 U2.15 U4.23 U5.33 | length 107.2
  Top Layer w0.2: J13.2 7.6,18.4 v1(8.5,19.3) ; v1@20.7,33.9 20.7,32.445 U4.23 20.775,30.925 21.4,30.3 29.2,30.3 v1(29.8,29.7) ; R7.1 45.6,17.3 44.232,18.668 U5.33 44.3,20.602 v1(44.3,25.9) 46.25,25.9 47.55,24.6 49.083,24.6 49.106,24.623 49.323,24.623 v1(49.4,24.7) ; v1(46.9,39.5) 46.9,45.6 52.125,50.825 U2.15
  Bottom Layer w0.2: v1(8.5,19.3) 10.434,21.234 10.434,29.266 14.495,33.327 19.827,33.327 v1(20.7,34.2) ; v1(29.8,29.7) 30.5,29.7 34.5,25.7 43.992,25.7 44.192,25.9 v1(44.3,25.9) ; v1(46.9,39.5) 46.907,39.493 46.907,39.059 49.4,36.566 v1(49.4,24.7)
SDA_0: P1.2 U4.4 | length 25.7
  Top Layer w0.2: v1(14.6,8.7) 14.579,8.721 14.579,8.887 14.7,9.008 14.7,11.666 22.075,19.041 U4.4 ; v1(16.2,6.4) 16.2,4.825 P1.2
  Bottom Layer w0.2: v1(14.6,8.7) 14.6,8.1 16.2,6.5 v1(16.2,6.4)
SDA_1: P2.2 U4.6 | length 24.1
  Top Layer w0.2: U4.6 23.375,10.525 25.948,7.952 25.948,7.703 v1(26.025,7.626) ; P2.2 27.9,4.775 v1(27.9,6.4)
  Bottom Layer w0.2: v1(26.025,7.626) 26.074,7.626 27.223,6.477 27.823,6.477 v1(27.9,6.4)
SDA_2: P3.2 U4.8 | length 28.3
  Top Layer w0.2: U4.8 24.675,20.625 v1(37.5,7.8) ; P3.2 39.5,4.775 v1(39.5,6.2)
  Bottom Layer w0.2: v1(37.5,7.8) 37.574,7.726 37.874,7.726 39.4,6.2 v1(39.5,6.2)
SDA_3: P4.2 U4.10 | length 37.8
  Top Layer w0.2: U4.10 25.975,21.859 39.634,8.2 48.225,8.2 v1(49.225,7.2) ; v1(51,6.3) 51,4.825 P4.2
  Bottom Layer w0.2: v1(49.225,7.2) 50.125,6.3 v1(51,6.3)
SDA_4: P5.2 U4.13 | length 31.7
  Top Layer w0.2: P5.2 17.6,55.175 17.6,52.917 17.9,52.617 v1(17.9,52.6) ; U4.13 27.275,37.975 v1(27.3,38)
  Bottom Layer w0.2: v1(17.9,52.6) 26,52.6 27.3,51.3 v1(27.3,38)
SDA_5: P6.2 U4.15 | length 24.1
  Top Layer w0.2: U4.15 25.975,37.875 v1@26,37.9 ; v1(26,50.6) 29.125,53.725 P6.2
  Bottom Layer w0.2: v1(26,38) v1(26,50.6)
SDA_6: P7.2 U4.17 | length 36
  Top Layer w0.2: U4.17 24.675,37.875 v1@24.7,37.9 ; v1(24.7,49.2) 35.9,49.2 40.725,54.025 P7.2
  Bottom Layer w0.2: v1(24.7,38) v1(24.7,49.2)
SDA_7: P8.2 U4.19 | length 48.5
  Top Layer w0.2: v1@23.3,37.8 23.375,37.725 U4.19 ; v1(23.4,48.1) 46.846,48.1 52.325,53.579 P8.2
  Bottom Layer w0.2: v1(23.3,38) 23.4,38.1 v1(23.4,48.1)
SPI_CLK: R2.2 U5.30 | length 46.6
  Top Layer w0.2: v1(77.4,22.1) 77.4,23.113 77.45,23.163 R2.2
  Top Layer w0.254: U5.30 40.4,20.512 40.6,20.312 v1(40.6,17.1)
  Bottom Layer w0.2: v1(40.6,17.1) 40.666,17.166 40.866,17.166 41.1,17.4 48.686,17.4 49.186,17.9 59.782,17.9 62.8,20.918 67.682,25.8 73.766,25.8 77.4,22.166 v1(77.4,22.1)
SPI_CS: R3.2 U5.29 | length 31.1
  Top Layer w0.2: v1(62.5,24) 63.273,24 R3.2
  Top Layer w0.254: U5.29 39.1,20.482 39.3,20.282 v1(39.3,18)
  Bottom Layer w0.2: v1(39.3,18) 39.408,18 39.608,17.8 48.444,17.8 48.944,18.3 59.616,18.3 62.5,21.184 v1(62.5,24)
SPI_MISO: U3.11 U5.31 | length 32.8
  Top Layer w0.2: v1(66.5,22.7) U3.11
  Top Layer w0.254: U5.31 41.8,20.427 41.7,20.327 v1(41.7,16.6)
  Bottom Layer w0.2: v1(41.7,16.6) 50.9,16.6 51.292,16.992 60.292,16.992 66,22.7 v1(66.5,22.7)
SPI_MOSI: R1.2 U5.37 | length 37.1
  Top Layer w0.2: v1(76.5,21.9) 76.577,21.823 76.694,21.823 77.238,21.279 77.238,21.125 77.249,21.114 R1.2@77.513,21.114
  Top Layer w0.254: U5.37 49.4,20.447 v1(49.4,17.227)
  Bottom Layer w0.2: v1(49.4,17.227) 49.494,17.227 49.713,17.446 60.046,17.446 68,25.4 73.6,25.4 76.5,22.5 v1(76.5,21.9)
SW_CANCEL: J13.6 U5.5 | length 55.4
  Top Layer w0.2: J13.6 8.9,16.4 11.5,19 v1(14.4,19) ; v1(38.724,23.2) 38.648,23.277 38.648,23.469 38.6,23.517 38.6,33 40.102,34.502 44.9,34.502 45.502,35.105 U5.5
  Bottom Layer w0.2: v1(14.4,19) 16.1,19 16.6,19.5 28.031,19.5 31.731,23.2 37.651,23.2 37.751,23.1 38.248,23.1 38.272,23.123 38.648,23.123 v1(38.724,23.2)
SW_DE: J13.4 U5.7 | length 51.2
  Top Layer w0.2: J13.4 8.449,17.4 11.349,20.3 v1(14.6,20.3) ; v1(37.3,24.3) 37.8,24.8 37.8,33.331 39.771,35.302 42.7,35.302 42.962,35.565 U5.7
  Bottom Layer w0.2: v1(14.6,20.3) 27.7,20.3 31.5,24.1 36.992,24.1 37.192,24.3 v1(37.3,24.3)
SW_IND: J13.5 U5.6 | length 53.4
  Top Layer w0.2: J13.5 8.7,16.9 11.5,19.7 v1(15.4,19.7) ; v1@37.95,23.75 37.95,23.758 38.2,24.008 38.2,33.166 39.937,34.902 44.115,34.902 44.232,35.02 U5.6
  Bottom Layer w0.2: v1(15.4,19.7) 15.934,19.7 16.134,19.9 27.866,19.9 31.666,23.7 v1(38,23.7)
SW_OK: J13.7 U5.4 | length 57.4
  Top Layer w0.2: J13.7 9.4,15.9 11.9,18.4 v1(15.2,18.4) ; v1(39.5,22.7) 39.5,23.7 39,24.2 39,32.834 40.266,34.1 45.5,34.1 46.772,35.372 U5.4
  Bottom Layer w0.2: v1(15.2,18.4) 16.066,18.4 16.766,19.1 28.197,19.1 31.797,22.7 37.586,22.7 37.686,22.6 39.183,22.6 39.206,22.623 39.423,22.623 v1(39.5,22.7)
U2_RX: C5.2 U5.27 | length 34
  Top Layer w0.2: C5.2 9.46,12.9 11.845,12.9 12.642,13.696 15.823,16.878 15.823,17.169 v1(15.9,17.245) ; v1(36.6,18.4) 36.6,20.522 U5.27
  Bottom Layer w0.2: v1(15.9,17.245) 15.9,17.29 17.31,18.7 36.192,18.7 36.492,18.4 v1(36.6,18.4)
U2_TX: C5.1 U5.28 | length 33.6
  Top Layer w0.2: C5.1 11.26,12.16 11.671,12.16 16.8,17.289 v1(16.8,17.342) ; v1(37.8,17.4) 37.882,17.482 U5.28
  Bottom Layer w0.2: v1(16.8,17.342) 17.758,18.3 35.6,18.3 36.5,17.4 v1(37.8,17.4)
USB_RX: LD1.2 R16.2 U6.3 | length 4.9
  Top Layer w0.2: U6.3 17.843,41.966 18.542,42.664 LD1.2 18.326,42.944 R16.2
USB_TX: LD2.2 R17.2 U6.2 | length 4.7
  Top Layer w0.2: U6.2 LD2.2 18.326,40.48 R17.2
VCC: C2.2 C3.2 C7.1 C7.2 C8.2 J1.P4 J2.3 J3.3 J12.5 J12.6 J12.7 R5.2 R6.2 R7.2 R8.2 R13.2 R14.2 U1.19 U2.16 U3.14 U4.24 U5.2 U6.4 | length 219.6
  Top Layer w0.3: J12.7 J12.6 ; J12.5 J12.6 ; C3.2 15.536,29.776 14.16,28.4 J12.6 ; v1(20.1,35.8) 20.043,35.743 20.043,35.53 20,35.488 20,34 20.125,33.875 U4.24 20.163,32.332 20.163,30.237 v1(20.2,30.2) ; v1@21.6,43.9 v1(21.5,44) 24.2,44 24.422,43.778 R13.2 24.403,42.582 24.403,40.715 R14.2 24.384,39.484 24.2,39.3 v1(21.8,39.3) ; v1(66.3,19.1) 66.3,20.574 66.476,20.75 U3.14 69.143,20.75 71.1,22.707
  Top Layer w0.4: v1(14,43) 14.054,43 14.254,43.2 14.8,43.2 14.807,43.207 15.912,43.207 U6.4 ; C3.2 15.95,30.127 R5.2 18,31.966 18.404,32.37 U4.24 ; U1.19 63.875,41.875 v1(63.9,41.9) ; J1.P4 66.18,17.28 v1(66.21,17.31) ; 71.1,22.707 71.1,24.187 72.4,25.487 C2.2 73.5,27.3 v1(74.9,28.7) ; J2.3 74.662,34.438 76.162,34.438 v1(76.2,34.4)
  Top Layer w0.5: v1(27.3,22.6) 27.319,22.581 27.442,22.581 28.673,21.35 R8.2 28.673,21.05 35.123,14.6 45.573,14.6 R7.2 ; R7.2@45.6,14.6 R6.2@47.3,14.6 ; R6.2 47.314,14.587 v1@48.687,14.587 ; U5.2 49.312,41.689 C8.2 49.3,42.124 49.3,46.3 52.555,49.555 U2.16 63.955,49.555 64,49.6 v1(64,45) ; C7.1 C7.2 ; J3.3 76.048,48.475 76.173,48.6 v1(76.2,48.6)
  Bottom Layer w0.3: v1(14,43) 20.5,43 v1(21.5,44) ; v1(20.1,35.8) 21.8,37.5 v1(21.8,39.3)
  Bottom Layer w0.4: v1(63.9,41.9) 63.9,41.954 64,42.054 v1(64,45) ; v1(74.9,28.7) 74.9,28.75 76.2,30.05 v1(76.2,34.4)
  Bottom Layer w0.5: v1(20.2,30.2) 20.2,29.7 v1(27.3,22.6) ; v1(48.7,14.6) 49.5,15.4 64.3,15.4 v1(66.21,17.31) 66.21,17.337 66.3,17.427 v1(66.3,19.1) ; v1(63.977,49.578) 63.977,56.178 65.8,58 C7.1 ; v1(64,45) 76.2,45 ; C7.2 76.2,56.64 v1(76.2,48.6) 76.2,45 ; v1(76.2,34.4) 76.2,45
XI: C9.1 U6.7 Y1.2 | length 19.7
  Top Layer w0.2: C9.1 15.494,34.854 16.891,36.251 Y1.2 16.891,38.156 16.637,38.41 13.716,38.41 13.208,38.918 13.208,46.508 13.746,47.046 U6.7
XO: C10.1 U6.8 Y1.1 | length 18.4
  Top Layer w0.2: C10.1 13.716,35.108 12.573,36.251 Y1.1 13.081,36.886 13.081,38.479 12.808,38.752 12.808,48.008 13.116,48.316 U6.8
pads on no net: J1. J1.P1 J1.P8 J1.P9 J2.7 J2.8 J3.7 J3.8 J12.4 J12.8 J12.S1 J12.S2 J13.S1 J13.S2 J14. J14.A8 J14.B8 P1.P1 P1.P2 P2.P1 P2.P2 P3.P1 P3.P2 P4.P1 P4.P2 P5.P1 P5.P2 P6.P1 P6.P2 P7.P1 P7.P2 P8.P1 P8.P2 U2.9 U2.10 U2.11 U2.12 U2.13 U5.17 U5.18 U5.19 U5.20 U5.21 U5.22 U5.32 U6.9 U6.10 U6.11 U6.12 U6.15

## Polygon pours and split planes (outlines as drawn)
GND on Top Layer "GND_L01_P004" (solid, remove dead copper, pour order 4): 0,0 80,0 80,60 0,60
AO2 on Top Layer "NONET_L-01_P-001" (solid, remove dead copper, pour order 3): 67.8,42.1 67.8,41 71.1,41 71.2,40.9 71.2,33 71.4,32.8 75.5,32.8 75.5,33.7 73.1,33.7 73.1,34.3 72.2,34.3 72.2,42 72.1,42.1
AO1 on Top Layer "NONET_L-01_P-001" (solid, remove dead copper, pour order 2): 67.8,39.5 67.8,38.2 69.9,38.2 69.9,31.9 70.3,31.5 75.5,31.5 75.5,32.5 70.6,32.5 70.5,32.6 70.5,39.5
BO2 on Top Layer "NONET_L-01_P-001" (solid, remove dead copper, pour order 1): 69.4,42.3 69.4,43.3 69.3,43.4 67.4,43.4 67.4,46.8 75.5,46.8 75.5,47.8 66.6,47.8 66.6,42.3
BO1 on Top Layer "NONET_L-01_P-001" (solid, remove dead copper, pour order 0): 67.8,44.9 69.7,44.9 70,45.2 75.5,45.2 75.5,46.4 73.3,46.4 67.8,46.4
GND on Bottom Layer "GND_L02_P005" (solid, remove dead copper, pour order 5): 0,0 80,0 80,60 0,60

## Keep-outs
Keep-Out Layer:
  lines w0.254: 0,0 80,0 80,60 78.105,60 0,60 0,6.914 0,0

## Silkscreen, mask and mechanical layers (free items; w line width, h text height)
Top Overlay:
  lines w0.254: 3.8,59.5 3.8,56.9 8.9,56.9 8.9,59.6 ; 11.7,53.3 11.7,50.9 56.9,50.9 56.9,53.8 ; 11.8,6.8 11.8,8.3 56.8,8.3 56.8,5.7 ; 74.7,41.4 72.6,41.4 72.6,29.1 75,29.1 ; 74.7,55.5 72.7,55.5 72.7,42.7 74.8,42.7 ; 79.5,6.7 75.7,6.7 75.7,14.4 ; 79.6,14.4 75.7,14.4 ; 79.6,19.5 75.7,19.5 75.7,19.2 75.7,14.4
  text "5V" at 5.1,55.818 h1.5
  text "S2 S1 GND 5V" at 39.2,52.677 h2 r180
  text "B1 B2 VCC B A GND" at 73.686,44.4 h1.2 r90
  text "A1 A2 VCC B A GND" at 73.586,29.9 h1.2 r90
  text "9V" at 77.177,16.4 h2 r90
  text "GND" at 77.177,8.6 h2 r90
  text "S2 S1 GND 5V" at 29.2,6.823 h2

## Text inside footprints (layer, text, board x,y; h text height)
U5: Mechanical 13 "ANTENNA" at 54.412,35.035 h1.5 r270